# EAGLE board sensor ADC (EAGLE 4.11)
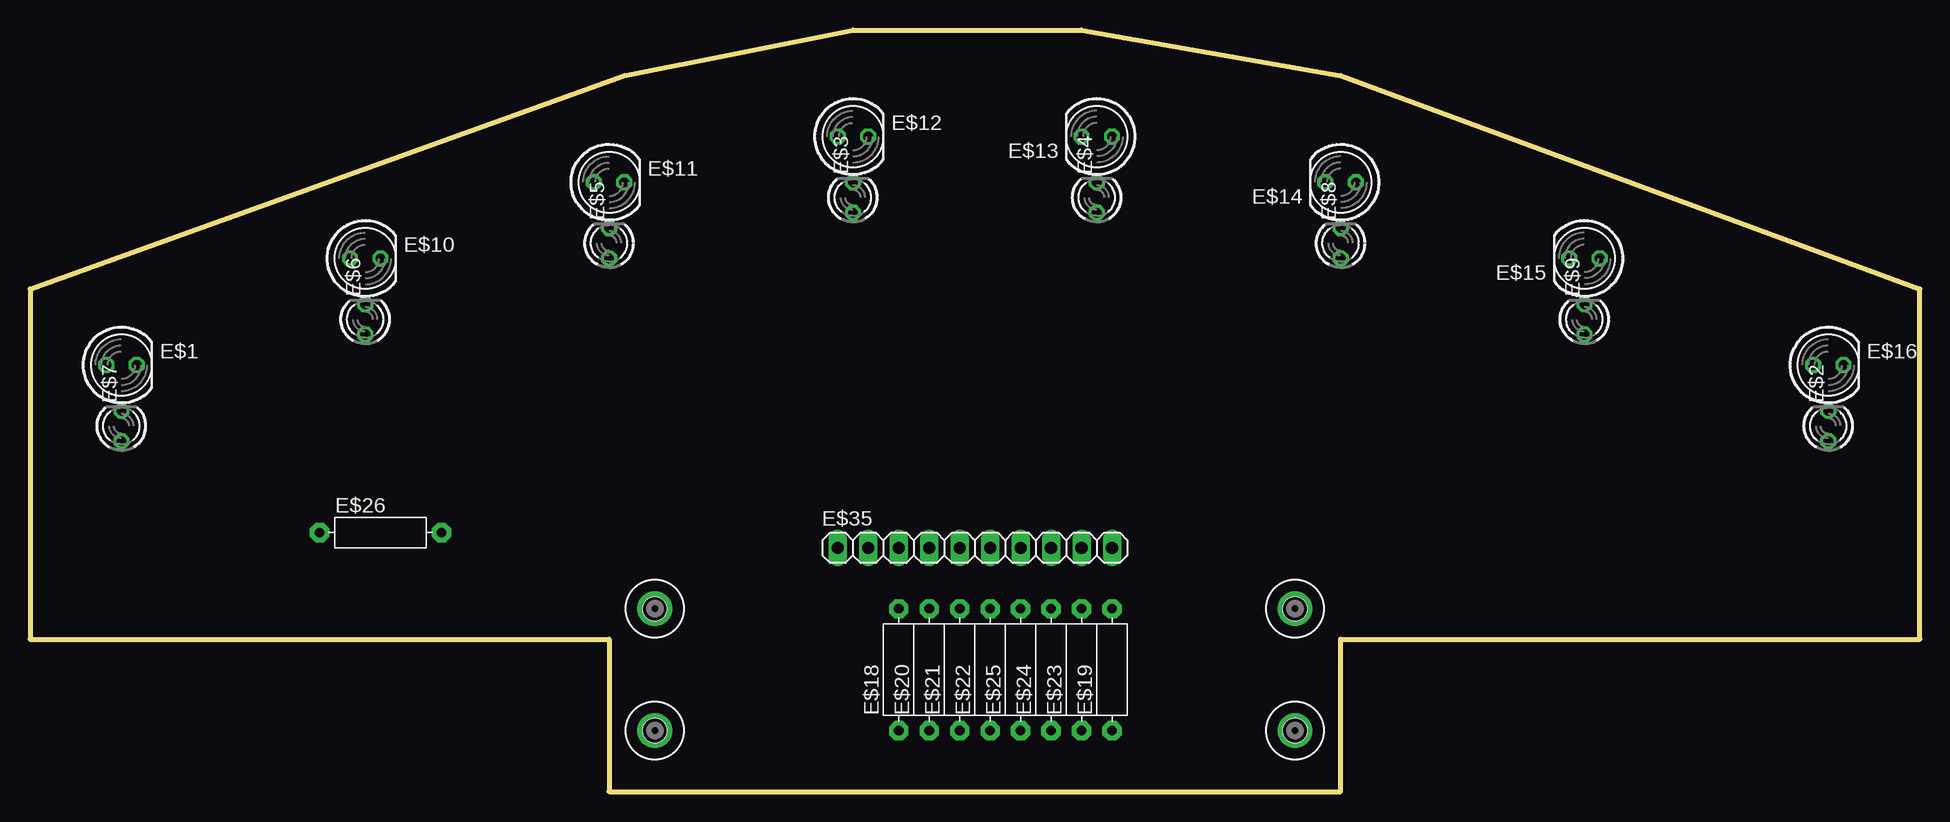
[diagram p0: board, top side]
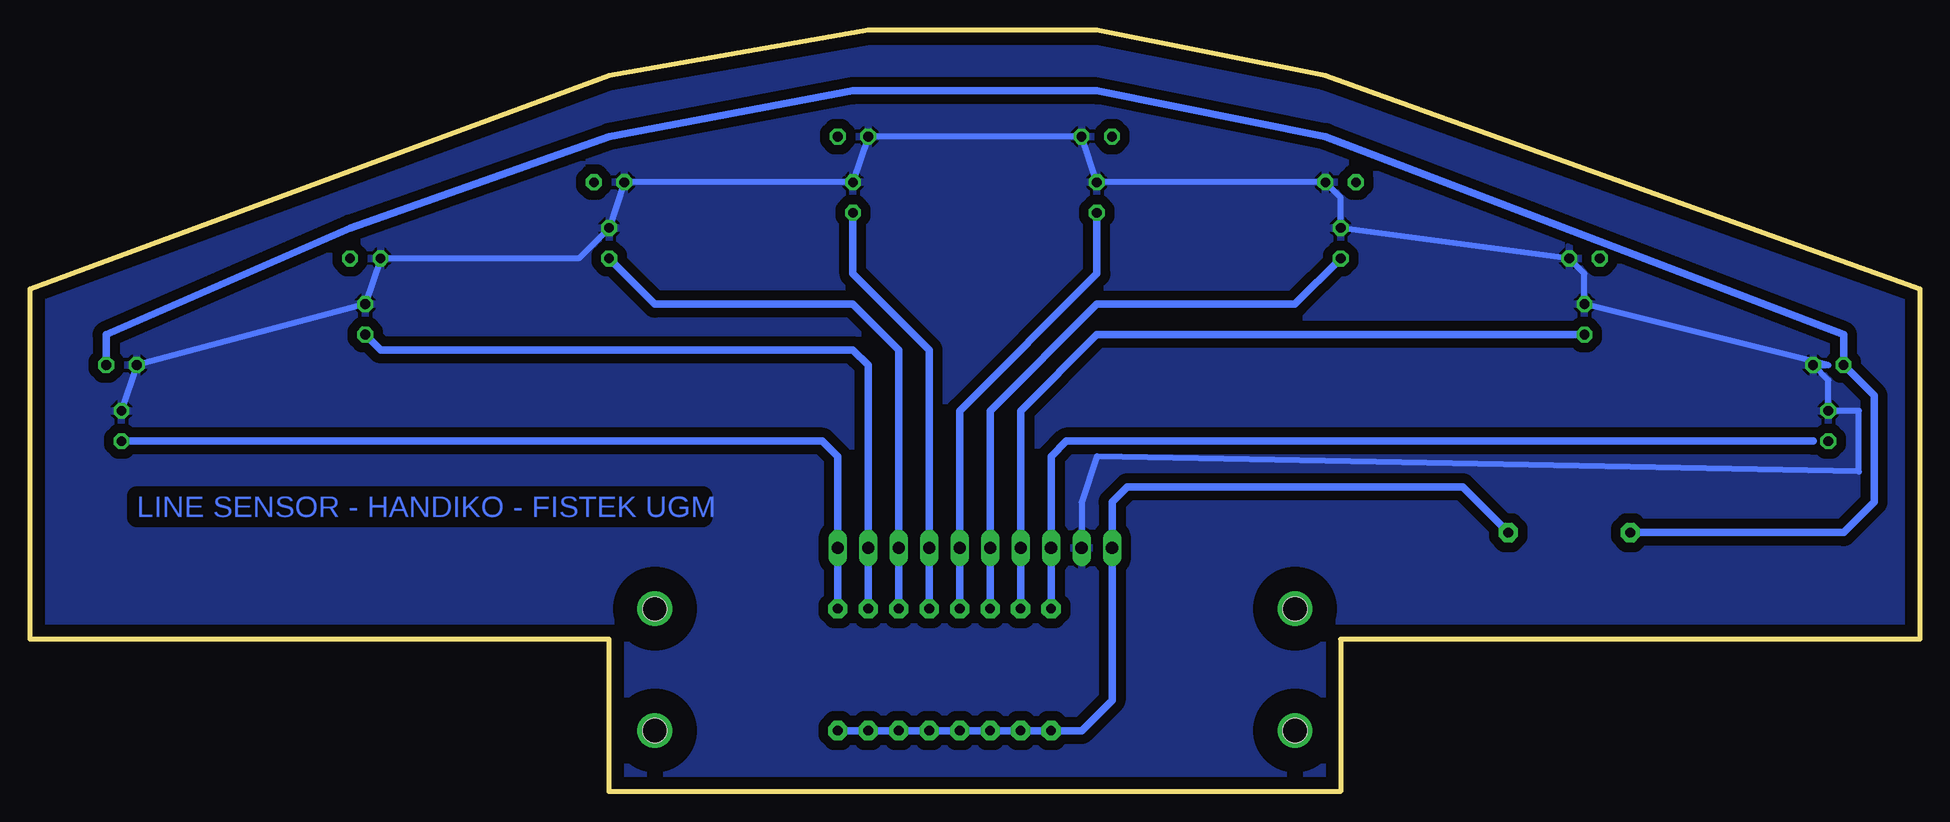
[diagram p1: board, bottom side, seen from below]

Size 157.48 x 63.5 mm. Coordinates in mm from the lower left corner, seen from the top.
Outline: 0,41.91 49.53,59.69 68.58,63.5 87.63,63.5 109.22,59.69 157.48,41.91 157.48,12.7 109.22,12.7 109.22,0 48.26,0 48.26,12.7 0,12.7 0,41.91
Copper layers (1*16): Top 0.035mm / dielectric 1.5mm / Bottom 0.035mm
Design rules "default": minimum track width 20mil, minimum drill 24mil, track to track 15mil, track to pad 10mil, pad to pad 10mil, via to via 10mil, smd to smd 8mil, copper to edge 40mil, drill to drill 8mil, minimum pad ring 10mil, minimum via ring 8mil, stop-mask expansion 4mil, vias tented up to drill 0mil, thermal gap 10mil

## Footprints (pad centres in the part's own frame; a part is rotated, then mirrored left to right if it is on the bottom)
LED5MM = drill 0.813 octagon: A -1.27,0; K 1.27,0
LED3MM = drill 0.813 octagon: A -1.27,0; K 1.27,0
DRIL-2 = hole 2: 0,0
R-10 = drill 0.813 pad 1.6 octagon: 1 -5.08,0; 2 5.08,0
1X10 = drill 1.016 long: 1 -11.43,0; 2 -8.89,0; 3 -6.35,0; 4 -3.81,0; 5 -1.27,0; 6 1.27,0; 7 3.81,0; 8 6.35,0; 9 8.89,0; 10 11.43,0

## Placement (x,y rotation side)
E$1  [LED5MM]  7.62,35.56 0 top
E$2  [LED3MM]  149.86,30.48 90 top
E$3  [LED3MM]  68.58,49.53 90 top
E$4  [LED3MM]  88.9,49.53 90 top
E$5  [LED3MM]  48.26,45.72 90 top
E$6  [LED3MM]  27.94,39.37 90 top
E$7  [LED3MM]  7.62,30.48 90 top
E$8  [LED3MM]  109.22,45.72 90 top
E$9  [LED3MM]  129.54,39.37 90 top
E$10  [LED5MM]  27.94,44.45 0 top
E$11  [LED5MM]  48.26,50.8 0 top
E$12  [LED5MM]  68.58,54.61 0 top
E$13  [LED5MM]  88.9,54.61 180 top
E$14  [LED5MM]  109.22,50.8 180 top
E$15  [LED5MM]  129.54,44.45 180 top
E$16  [LED5MM]  149.86,35.56 0 top
E$17  [DRIL-2]  52.07,5.08 0 top
E$18  [R-10]  72.39,10.16 90 top
E$19  [R-10]  90.17,10.16 90 top
E$20  [R-10]  74.93,10.16 90 top
E$21  [R-10]  77.47,10.16 90 top
E$22  [R-10]  80.01,10.16 90 top
E$23  [R-10]  87.63,10.16 90 top
E$24  [R-10]  85.09,10.16 90 top
E$25  [R-10]  82.55,10.16 90 top
E$26  [R-10]  29.21,21.59 0 top
E$28  [DRIL-2]  52.07,15.24 0 top
E$29  [DRIL-2]  105.41,5.08 0 top
E$30  [DRIL-2]  105.41,15.24 0 top
E$35  [1X10]  78.74,20.32 0 top

## Library data of the parts
E$1-E$16 = led
E$17 E$28-E$30 = special
E$18-E$26 = discrete
E$35 = pinhead

## Nets
S$1: E$4.A E$25.2 E$35.7
S$2: E$1.K E$2.K E$3.K E$4.K E$5.K E$6.K E$7.K E$8.K E$9.K E$10.K E$11.K E$12.K E$13.K E$14.K E$15.K E$16.A E$35.2
S$7: E$8.A E$24.2 E$35.8
S$8: E$9.A E$23.2 E$35.9
S$9: E$2.A E$19.2 E$35.10
S$14: E$3.A E$22.2 E$35.6
S$18: E$5.A E$21.2 E$35.5
S$21: E$6.A E$20.2 E$35.4
S$22: E$18.2 E$35.3
S$24: E$1.A E$16.K E$26.1
S$25: E$18.1 E$19.1 E$20.1 E$21.1 E$22.1 E$23.1 E$24.1 E$25.1 E$26.2 E$35.1

## Tracks (layer width: path | path; a pad name or v marks a point on that pad's centre or on a via)
S$1
  Bottom 0.61: E$25.2 E$35.7 82.55,36.83 88.9,43.18 E$4.A
S$2
  Bottom 0.508: E$35.2 69.85,24.13 68.58,27.94 5.08,26.67 5.08,31.75 E$7.K 7.62,34.29 E$1.K 7.62,35.56 E$6.K 27.94,43.18 E$10.K E$5.K 48.26,49.53 E$11.K E$3.K E$12.K E$13.K E$4.K E$14.K E$8.K 111.76,44.45 E$15.K E$9.K E$16.A E$2.K
  pour Bottom (isolate 0.61): 0,12.7 48.26,12.7 48.26,0 48.26,12.7
  pour Bottom (isolate 0.813): 48.26,0 109.22,0 109.22,12.7 157.48,12.7 157.48,41.91 109.22,59.69 87.63,63.5 68.58,63.5 49.53,59.69 0,41.91 0,12.7 48.26,12.7
S$7
  Bottom 0.61: E$8.A 105.41,40.64 88.9,40.64 85.09,36.83 E$35.8 E$24.2
S$8
  Bottom 0.61: E$9.A 128.27,36.83 88.9,36.83 87.63,35.56 E$35.9 E$23.2
S$9
  Bottom 0.61: E$2.A 91.44,29.21 90.17,27.94 E$35.10 E$19.2
S$12  (via drill 1.93)
  other vias: 52.07,15.24
S$14
  Bottom 0.61: E$3.A 68.58,43.18 80.01,31.75 E$35.6 E$22.2
S$15  (via drill 1.93)
  other vias: 52.07,5.08
S$16  (via drill 1.93)
  other vias: 105.41,5.08
S$18
  Bottom 0.61: E$5.A 52.07,40.64 68.58,40.64 77.47,31.75 E$35.5 E$21.2
S$19  (via drill 1.93)
  other vias: 105.41,15.24
S$21
  Bottom 0.61: E$6.A 68.58,38.1 74.93,31.75 E$35.4 E$20.2
S$22
  Bottom 0.61: 8.89,29.21 71.12,29.21 72.39,27.94 E$35.3 E$18.2
S$24
  Bottom 0.61: E$16.K 151.13,38.1 130.81,46.99 109.22,54.61 88.9,58.42 68.58,58.42 49.53,54.61 6.35,38.1 E$1.A 3.81,33.02 3.81,24.13 6.35,21.59 E$26.1
S$25
  Bottom 0.61: E$26.2 38.1,25.4 66.04,25.4 67.31,24.13 E$35.1 67.31,7.62 69.85,5.08 E$18.1 E$20.1 E$21.1 E$22.1 E$25.1 E$24.1 E$23.1 E$19.1

## Text on the board
Bottom: LINE SENSOR - HANDIKO - FISTEK UGM